# Altium PCB FPGA.PcbDoc (part 2 of 2)
Units mil, origin at the board's own origin, x right, y up, seen from the top; angles counter-clockwise.
Board outline 4158 x 2670 mil, 4 copper layers (Top Layer, Middle 1 Layer, Middle 2 Layer, Bottom Layer), stack 51.864 mil thick; 135 components, 122 nets, 386 pads, 107 vias.
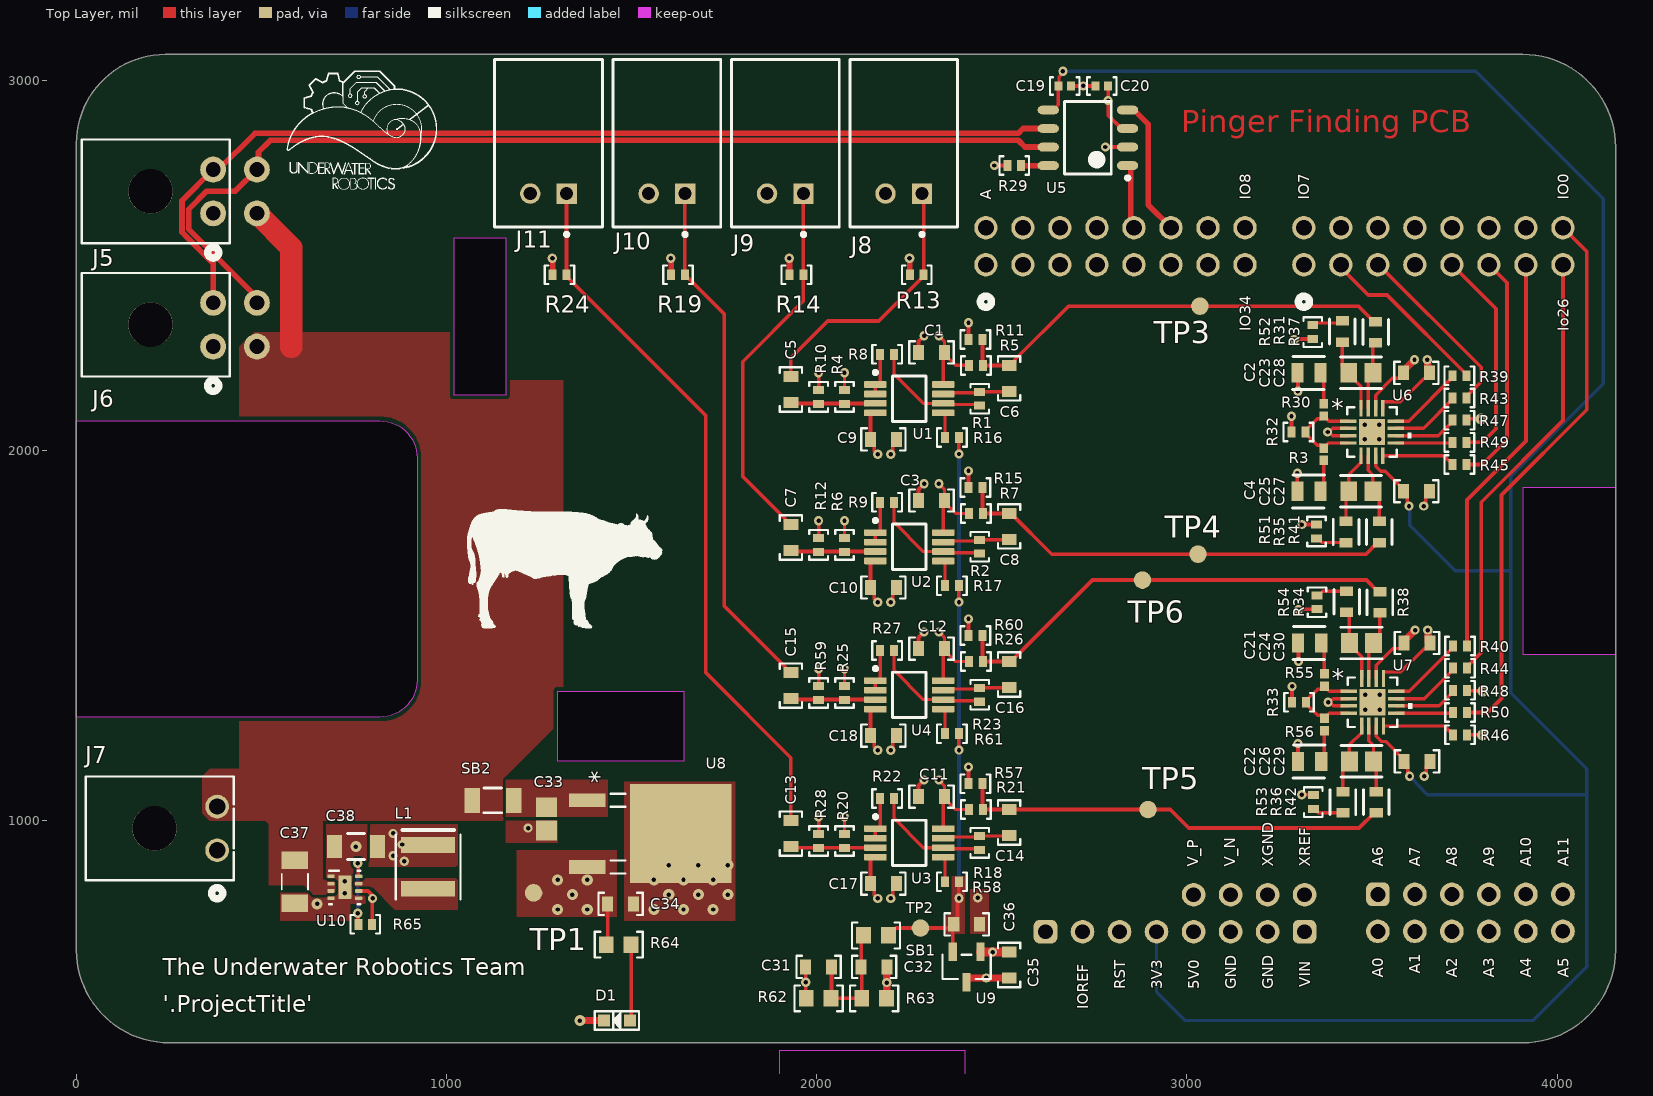
[diagram p0: Top Layer view]

## Polygon pours and split planes (outlines as drawn) (continued)
GND on Top Layer "NONET_L-01_P-001" (solid, remove dead copper, pour order 7): 1480,1105 1480,730 1780,730 1780,1105
GND on Top Layer "NONET_L-01_P-001" (solid, remove dead copper, pour order 6): 1160,1000 1300,1000 1300,940 1160,940
NetC33_2 on Top Layer "NONET_L-01_P-001" (solid, remove dead copper, pour order 5): 1160,1010 1160,1110 1435,1110 1435,1010
+2.5 on Top Layer "NONET_L-01_P-001" (solid, remove dead copper, pour order 4): 2365,850 2365,755 2345,735 2345,695 2400,695 2400,850
GND on Top Layer "NONET_L-01_P-001" (solid, remove dead copper, pour order 3): 2415,815 2470,815 2465,810 2465,695 2415,695
12V on Top Layer "NONET_L-01_P-001" (solid, remove dead copper, pour order 0): 340,1120 360,1140 440,1140 440,2280 480,2320 1020,2320 1020,2190 1315,2190 1315,1275 1040,1000 360,1000 340,1020
GND on Middle 1 Layer "NONET_L-01_P-001" (solid, remove dead copper, pour order 1): 0,3400 4300,3400 4300,0 0,0
+5 on Bottom Layer "NONET_L-01_P-001" (solid, remove dead copper, pour order 2): 0,3100 4300,3100 4300,400 0,400
GND on Middle 2 Layer "NONET_L-01_P-001" (solid, remove dead copper, pour order 15): 0,3400 4300,3400 4300,0 0,0

## Other copper
Top Layer:
  text "Pinger Finding PCB" at 2985.17,2860.01 h60

## Silkscreen, mask and mechanical layers (free items; w line width, h text height)
Top Overlay:
  drawing of 20 lines, arcs and shapes, not listed
  text "A" at 2472,2677 h30 r90
  text "IO8" at 3172,2677 h30 r90
  text "IO7" at 3331,2677 h30 r90
  text "IO0" at 4031,2677 h30 r90
  text "IO34" at 3172,2322.03 h30 r90
  text "Io26" at 4031,2322.03 h30 r90
  text "A6" at 3530.99,876 h30 r90
  text "A7" at 3630.99,876 h30 r90
  text "A8" at 3730.99,876 h30 r90
  text "A9" at 3830.99,876 h30 r90
  text "A10" at 3931,876 h30 r90
  text "A11" at 4030.99,876 h30 r90
  text "V_P" at 3030.5,875 h30 r90
  text "V_N" at 3130.5,875 h30 r90
  text "XGND" at 3232.99,875 h30 r90
  text "XREF" at 3332.99,875 h30 r90
  text "A1" at 3631,586.01 h30 r90
  text "The Underwater Robotics Team" at 232.5,582.5 h45
  text "A0" at 3530.99,576.02 h30 r90
  text "A2" at 3730.99,576.02 h30 r90
  text "A3" at 3830.99,576.02 h30 r90
  text "A4" at 3930.99,576.02 h30 r90
  text "A5" at 4030.99,576.02 h30 r90
  text "VIN" at 3333,550.02 h30 r90
  text "RST" at 2833,545.03 h30 r90
  text "3V3" at 2933,545.03 h30 r90
  text "5V0" at 3033,545.03 h30 r90
  text "GND" at 3133,545.03 h30 r90
  text "GND" at 3233,545.03 h30 r90
  text "IOREF" at 2733,490.04 h30 r90
  text "'.ProjectTitle'" at 232.5,482.5 h45
Bottom Overlay:
  drawing of 38 lines, arcs and shapes, not listed
Top Solder:
  text "Pinger Finding PCB" at 2985.17,2860.01 h60

## Text inside footprints (layer, text, board x,y; h text height)
J3: Bottom Overlay "1" at 3447,842 h30 r180
J4: Bottom Overlay "1" at 3387,659 h30
J12: Bottom Overlay "1" at 2548,680 h30 r180
U6: Top Overlay "*" at 3390,2090 h50; Mechanical 13 "*" at 3446.16,2064.37 h50
U7: Top Overlay "*" at 3391.5,1360 h50; Mechanical 13 "*" at 3447.66,1334.37 h50
U8: Top Overlay "*" at 1365,1135 h50 r270; Mechanical 13 "*" at 1495,1067.82 h50 r270